# Altium PCB processingModule.PcbDoc
Units mil, origin at the board's own origin, x right, y up, seen from the top; angles counter-clockwise.
Board outline 4785 x 2440 mil, 2 copper layers (Top Layer, Bottom Layer); 76 components, 68 nets, 344 pads, 1 vias.
Unrouted connection lines stored in the file: 160.
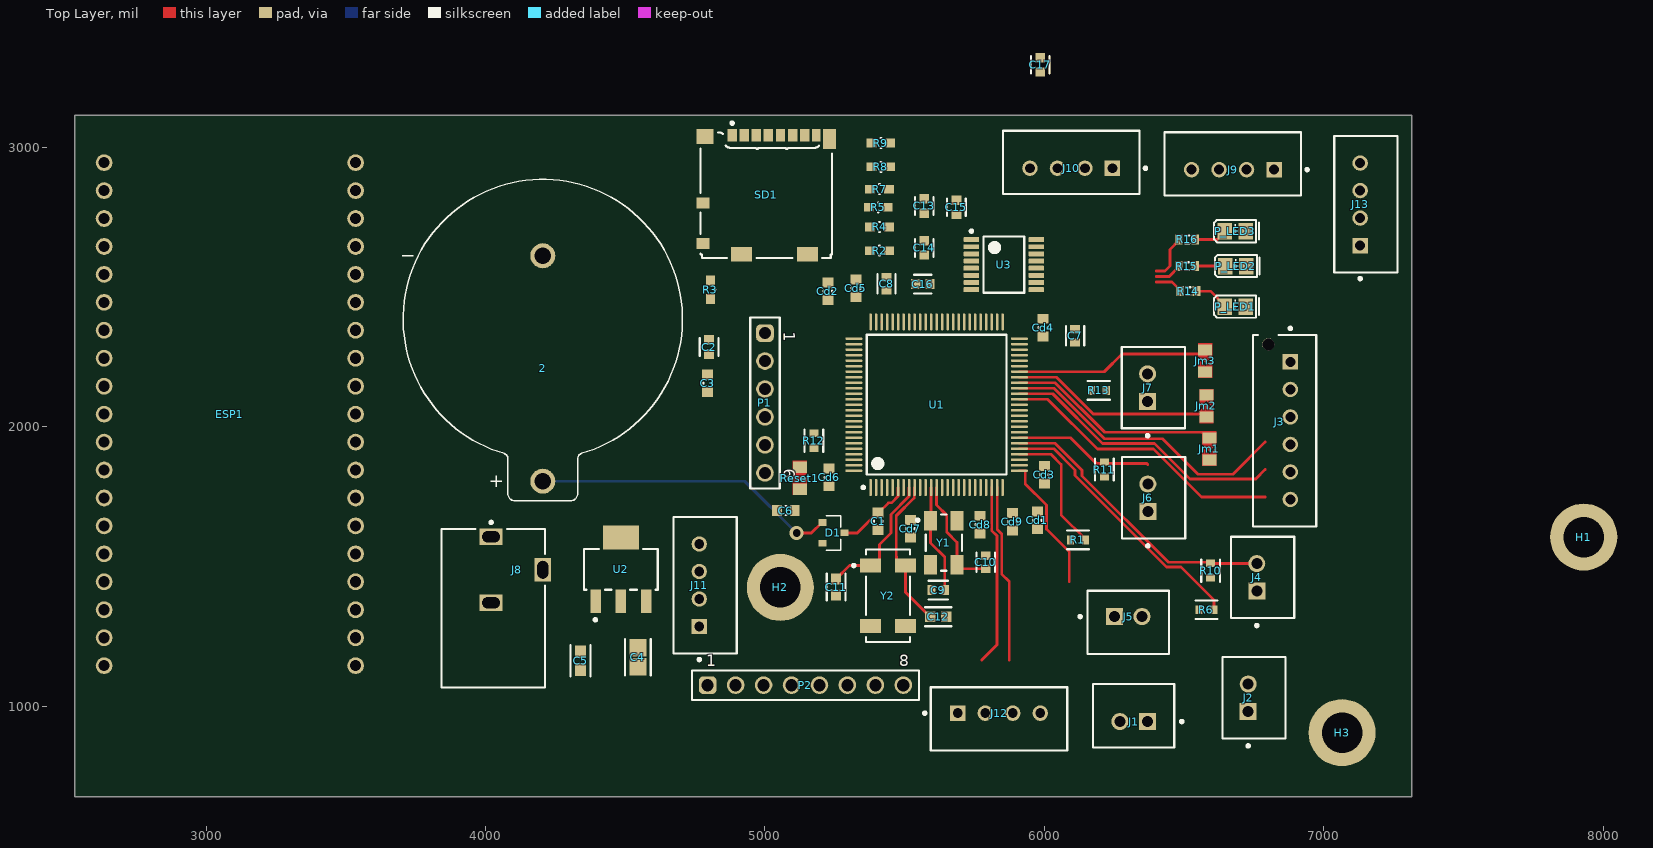
[diagram p0: Top Layer view]
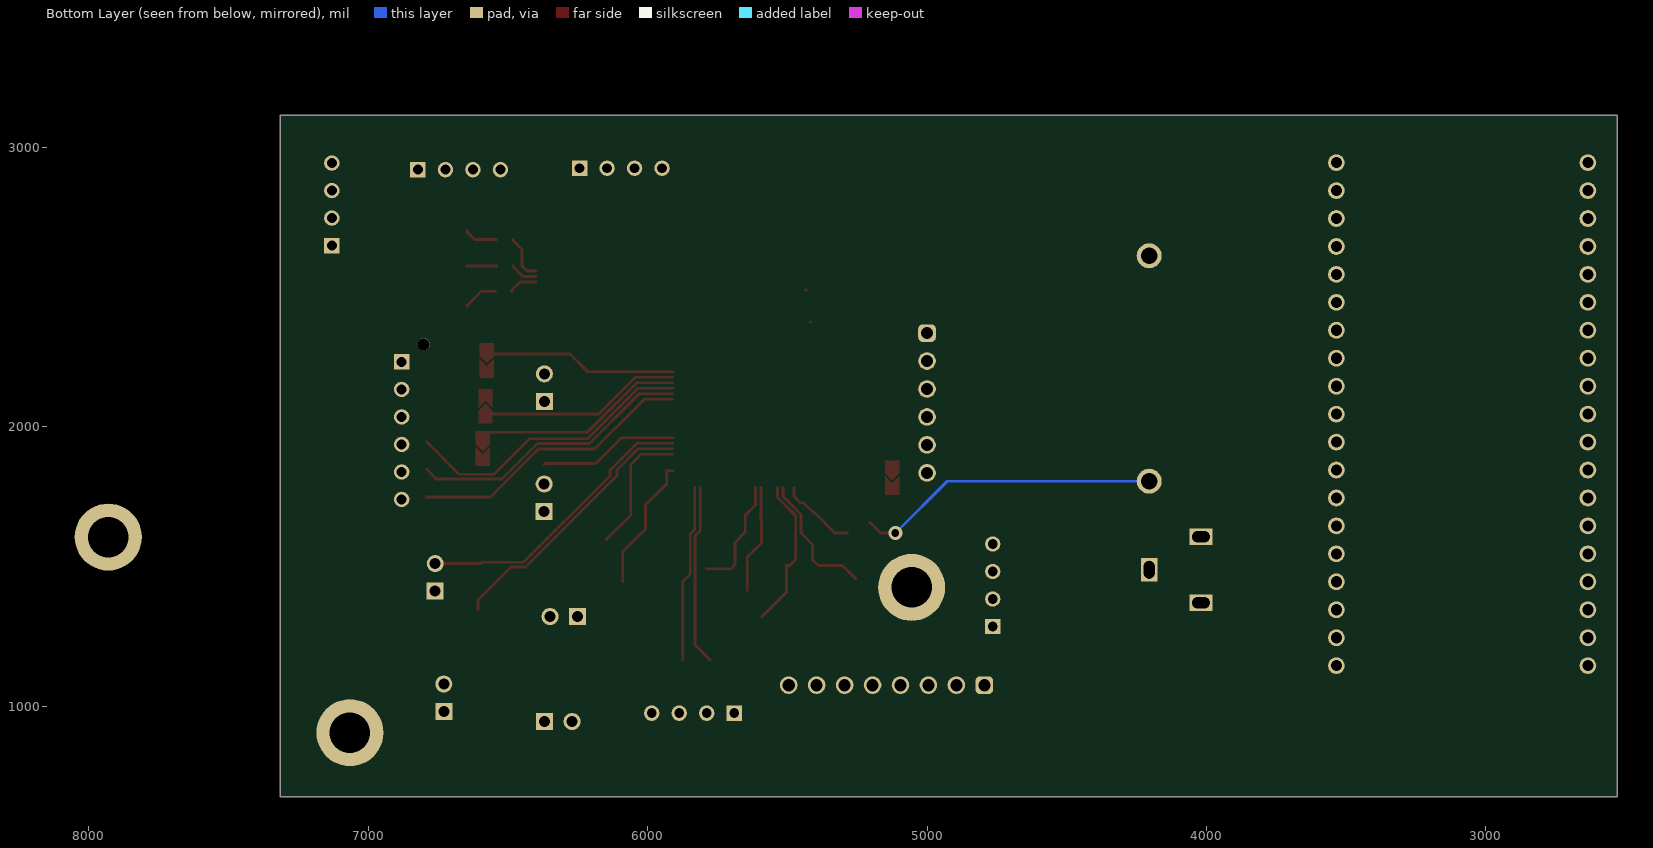
[diagram p1: Bottom Layer view, seen from below]

## Layer stack, top to bottom
Top Solder: solder mask 0.4, Solder Resist, Dk 3.5
Top Layer: signal copper 1.4
Dielectric 1: dielectric 12.6, FR-4, Dk 4.8
Bottom Layer: signal copper 1.4
Bottom Solder: solder mask 0.4, Solder Resist, Dk 3.5

## Board outline
2530,675 7315,675 7315,3115 2530,3115

## Design rules (kind name [scope] priority, off if disabled: settings)
Clearance [All] p1: gap=10 ignorepadtopadclearanceinfootprint=TRUE except(0: Arc-Hole Track-Hole SMDPad-Hole THPad-Hole Via-Hole Fill-Hole Poly-Hole Region-Hole Text-Hole; 7: Arc-Arc Arc-Track Track-Track SMDPad-SMDPad; 8: Arc-SMDPad Track-SMDPad)
PolygonConnect [All] p1: connectstyle=Relief reliefconductorwidth=10 reliefentries=4 polygonreliefangle="90 Angle" airgapwidth=10
RoutingVias [All] p1: holewidth=28 width=50 viastyle="Through Hole" minholewidth=28 minwidth=50 maxholewidth=28 maxwidth=50
SolderMaskExpansion [All] p1: expansion=4 istentingtop=FALSE
Width [All] p1: maxlimit=100 minlimit=7 preferedwidth=10 minimp=50.000000 maximp=50.000000 favimp=50.000000
30 further rules are at their usual default settings.

## Components (designator, comment, footprint, x,y, rotation, side; value= is the part's Value field where it differs from the comment)
2 "104" BAT_104 4205,2385 r0 top (schematic designator BT1)
C1 "CAP 10uF 10V 0603(1608)" CAPC0603(1608)100_N 5405,1661.5 r90 top value=10uF
C2 "C0603X104K5RACTU" FP-C0603-CJ-MFG 4800,2285 r90 top value=100nF
C3 "CAP 10uF 10V 0603(1608)" CAPC0603(1608)100_N 4795,2155 r90 top value=10uF
C4 "C2012X5R1A336M125AC" FP-C2012-125-0_2-IPC_A 4545,1175 r270 top
C5 "GRM188R71C474KA88D" FP-GRM188-0_1-e0_2_0_5-IPC_A 4340,1162.45 r270 top
C6 "CAP 100nF 16V 0603(1608)" CAPC0603(1608)100_N 5075,1700 r0 top value=100nF
C7 "C0603C225K4PACTU" FP-C0603C225K4PACTU-MFG 6110,2325 r90 top
C8 "C0603C225K4PACTU" FP-C0603C225K4PACTU-MFG 5435,2511.38 r90 top
C9 "C0603C200J5GACTU" FP-C0603C-CF-MFG 5620,1415 r180 top value="20 pF"
C10 "C0603C200J5GACTU" FP-C0603C-CF-MFG 5790,1515 r90 top value="20 pF"
C11 "CL10C500JC81PNC" FP-CL10-IPC_B 5255,1426.38 r270 top
C12 "CL10C500JC81PNC" FP-CL10-IPC_B 5620,1320 r0 top
C13 "C0603X104K5RACTU" FP-C0603-CJ-MFG 5570,2790 r270 top value=100nF
C14 "C0603X104K5RACTU" FP-C0603-CJ-MFG 5570,2640 r270 top value=100nF
C15 "C0603X104K5RACTU" FP-C0603-CJ-MFG 5685,2785 r90 top value=100nF
C16 "C0603X104K5RACTU" FP-C0603-CJ-MFG 5565,2510 r180 top value=100nF
C17 "C0603X104K5RACTU" FP-C0603-CJ-MFG 5985,3295 r270 top value=100nF
Cd1 "CAP 10uF 10V 0603(1608)" CAPC0603(1608)100_N 5975,1665 r270 top value=10uF
Cd2 "CAP 10uF 10V 0603(1608)" CAPC0603(1608)100_N 5225,2485 r270 top value=10uF
Cd3 "CAP 100nF 16V 0603(1608)" CAPC0603(1608)100_N 6000,1828.5 r90 top value=100nF
Cd4 "CAP 100nF 16V 0603(1608)" CAPC0603(1608)100_N 5995,2355 r270 top value=100nF
Cd5 "CAP 100nF 16V 0603(1608)" CAPC0603(1608)100_N 5325,2495 r270 top value=100nF
Cd6 "CAP 100nF 16V 0603(1608)" CAPC0603(1608)100_N 5230,1818.5 r270 top value=100nF
Cd7 "CAP 100nF 16V 0603(1608)" CAPC0603(1608)100_N 5520,1635 r90 top value=100nF
Cd8 "CAP 100nF 16V 0603(1608)" CAPC0603(1608)100_N 5770,1650 r90 top value=100nF
Cd9 "CAP 100nF 16V 0603(1608)" CAPC0603(1608)100_N 5885,1660 r90 top value=100nF
D1 "BAT54C" SOT23-R 5245,1620 r270 top
ESP1 "eecs300esp32" eecs300esp32-Footprint-1 3085,2045 r0 top
H1 "Mount_Holes" MountHole-4-40PTH 7930,1605 r90 top
H2 "Mount_Holes" MountHole-4-40PTH 5055,1425 r90 top
H3 "Mount_Holes" MountHole-4-40PTH 7065,905 r90 top
J1 "B2B-XH-A(LF)(SN)" FP-B2B-XH-A_LF_SN-MFG 6319.21,965.67 r180 top
J2 "B2B-XH-A(LF)(SN)" FP-B2B-XH-A_LF_SN-MFG 6750,1030 r90 top
J3 "B6B-XH-AM(LF)(SN)" FP-B6B-XH-AM_LF_SN-MFG 6859.33,1985.79 r90 top
J4 "B2B-XH-A(LF)(SN)" FP-B2B-XH-A_LF_SN-MFG 6780.67,1460.79 r90 top
J5 "B2B-XH-A(LF)(SN)" FP-B2B-XH-A_LF_SN-MFG 6300,1300 r0 top
J6 "B2B-XH-A(LF)(SN)" FP-B2B-XH-A_LF_SN-MFG 6390.67,1745.79 r90 top
J7 "B2B-XH-A(LF)(SN)" FP-B2B-XH-A_LF_SN-MFG 6390,2140 r90 top
J8 "PJ-102B" CUI-PJ-102B_V 4020,1488.11 r270 top
J9 "B4B-XH-A(LF)(SN)" FP-B4B-XH-A_LF_SN-MFG 6674.21,2940.67 r0 top
J10 "B4B-XH-A(LF)(SN)" FP-B4B-XH-A_LF_SN-MFG 6095.79,2945.67 r0 top
J11 "B4B-XH-A(LF)(SN)" FP-B4B-XH-A_LF_SN-MFG 4785.67,1432.64 r270 top
J12 "B4B-XH-A(LF)(SN)" FP-B4B-XH-A_LF_SN-MFG 5837.64,954.33 r180 top
J13 "B4B-XH-A(LF)(SN)" FP-B4B-XH-A_LF_SN-MFG 7150.67,2795.79 r270 top
Jm1 "SolderJumper" bridge 6590,1925 r270 top
Jm2 "SolderJumper" bridge 6580,2070 r90 top
Jm3 "SolderJumper" bridge 6575,2240 r270 top
P1 "Programming" 61300611121 5000,2085 r270 top
P2 "61300811121" 61300811121 5145,1075 r0 top
P_LED1 "LED2" LED0805 6682.6,2430 r0 top
P_LED2 "LED2" LED0805 6685,2575 r0 top
P_LED3 "LED2" LED0805 6682.6,2700 r0 top
R1 "RC0603FR-0710KL" FP-RC0603-0_55-IPC_C 6120,1595 r0 top
R2 "RC0603FR-0747KL" FP-RC0603FR-0747KL-MFG 5410,2630 r180 top
R3 "RC0603FR-0747KL" FP-RC0603FR-0747KL-MFG 4805,2490 r90 top
R4 "RC0603FR-0747KL" FP-RC0603FR-0747KL-MFG 5410,2715 r180 top
R5 "RC0603FR-0747KL" FP-RC0603FR-0747KL-MFG 5405,2785 r180 top
R6 "RC0603FR-0710KL" FP-RC0603-0_55-IPC_C 6580,1345 r0 top
R7 "RC0603FR-0747KL" FP-RC0603FR-0747KL-MFG 5410,2850 r180 top
R8 "RC0603FR-0747KL" FP-RC0603FR-0747KL-MFG 5415,2930 r180 top
R9 "RC0603FR-0747KL" FP-RC0603FR-0747KL-MFG 5415,3015 r0 top
R10 "RC0603FR-0710KL" FP-RC0603-0_55-IPC_C 6595,1485 r90 top
R11 "RC0603FR-0710KL" FP-RC0603-0_55-IPC_C 6215,1846.64 r90 top
R12 "RC0603FR-0710KL" FP-RC0603-0_55-IPC_C 5175,1950 r270 top
R13 "RC0603FR-0710KL" FP-RC0603-0_55-IPC_C 6195,2130 r0 top
R14 "500" J1-0603 6515,2485 r0 top value=10K
R15 "500" J1-0603 6510,2575 r0 top value=10K
R16 "500" J1-0603 6510.47,2670 r0 top value=10K
Reset1 "SolderJumper" bridge 5125,1820 r270 top
SD1 "104031-0811" MOLX-104031-0811_V 5005,2830 r180 top
U1 "STM32F407VGT7TR" STM-LQFP100_L 5614.37,2078.74 r90 top
U2 "LM3940IMP-3.3/NOPB" FP-DCY0004A-MFG 4484.45,1489.17 r90 top
U3 "MAX3232IPWR" PW0016A_N 5855,2580 r0 top
Y1 "ABM3B-8.000MHZ-10-D-1-G-T" FP-ABM3B-MFG 5640,1585 r270 top
Y2 "ABS25-32.768KHZ-T" FP-ABS25-MFG 5440,1395 r270 top

## Footprints (in the part's own frame and the unit in brackets; to place one, negate y for a bottom-side part, rotate by r counter-clockwise, add the part's x,y. Pads: shape width x height; smd on the part's side, far side on the other; paste and mask are expansions set on the pad)
61300611121 [mm] "Pin Header, pitch 2.54 mm, THT, Vertical, single row, 6p"
  rrect50% 1.6x1.6 hole 1.1: 1(-6.35,0)
  round 1.6 hole 1.1: 2(-3.81,0) 3(-1.27,0) 4(1.27,0) 5(3.81,0) 6(6.35,0)
  silkscreen extent -7.77,-1.35 7.77,1.35, body extent -7.62,-1.27 7.62,1.27, height 8.57
61300811121 [mm] "Pin Header, pitch 2.54 mm, THT, Vertical, single row, 8p"
  rrect50% 1.6x1.6 hole 1.1: 1(-8.89,0)
  round 1.6 hole 1.1: 2(-6.35,0) 3(-3.81,0) 4(-1.27,0) 5(1.27,0) 6(3.81,0) 7(6.35,0) 8(8.89,0)
  silkscreen extent -10.31,-1.35 10.31,1.35, body extent -10.16,-1.27 10.16,1.27, height 8.57
BAT_104 [mm]
  round 2.28 hole 1.52: N(0,5.758) P(0,-14.732)
  silkscreen extent -12.77,-16.51 12.7,12.7
bridge [mil]
  rect 40x50 smd: 1(-35,0) 2(44,0)
  Top Layer region: -2,-25 23,0 -2,25 64,25 64,-25
  Top Layer region: -58,-25 -13,-25 12,0 -13,25 -58,25
CAPC0603(1608)100_N [mm] "Chip Capacitor, Body 1.6x0.8mm, Height 1.0mm, IPC Medium Density"
  rect 0.9x1 smd: 1(-0.8,0) 2(0.8,0)
  silkscreen extent -0.05,-0.4 0.05,0.4, body extent -0.87,-0.48 0.88,0.47, height 1
CUI-PJ-102B_V [mm] "THD, 3-Leads, Body 14.4x9mm, Height 11mm"
  rect 1.5x2.1 hole 1 slot 1.6 at 90 deg: 1(-3,0) 2(3,0)
  rect 2.1x1.5 hole 1 slot 1.6 at 0 deg: 3(0,4.7)
  silkscreen extent -4.42,-4.5 10.7,4.9, body extent -3.7,-4.5 10.7,4.9, height 11
eecs300esp32-Footprint-1 [mil]
  round 60 hole 40: 1(-450,900) 2(-450,800) 3(-450,700) 4(-450,600) 5(-450,500) 6(-450,400) 7(-450,300) 8(-450,200) 9(-450,100) 10(-450,0) 11(-450,-100) 12(-450,-200) 13(-450,-300) 14(-450,-400) 15(-450,-500) 16(-450,-600) 17(-450,-700) 18(-450,-800) 19(-450,-900) 20(450,-900) 21(450,-800) 22(450,-700) 23(450,-600) 24(450,-500) 25(450,-400) 26(450,-300) 27(450,-200) 28(450,-100) 29(450,0) 30(450,100) 31(450,200) 32(450,300) 33(450,400) 34(450,500) 35(450,600) 36(450,700) 37(450,800) 38(450,900) ""(-450,-600) ""(450,-600)
  body extent -505,-955 505,945, height 190
FP-ABM3B-MFG [mm]
  rect 1.8x1.2 smd paste+0 mask+0: 1(-2,-1.2) 2(2,-1.2) 3(2,1.2) 4(-2,1.2)
  silkscreen extent -2.55,-2.5 2.55,1.65, body extent -3,-1.9 3,1.9, height 0.25
FP-ABS25-MFG [mm]
  rect 1.3x1.9 smd paste+0 mask+0: 1(-2.75,-1.6) 2(2.75,-1.6) 3(2.75,1.6) 4(-2.75,1.6)
  silkscreen extent -4.2,-3.22 4.2,2, body extent -4.3,-2.65 4.3,2.65, height 0.25
FP-B2B-XH-A_LF_SN-MFG [mm]
  rect 1.55x1.55 hole 1 paste-1000 mask+0: 1(-1.25,0.525)
  round 1.55 hole 1 paste-1000 mask+0: 2(1.25,0.525)
  silkscreen extent -4.5,-2.88 3.7,2.88, body extent -3.8,-2.98 3.8,2.98, height 0.25
FP-B4B-XH-A_LF_SN-MFG [mm]
  rect 1.4x1.4 hole 0.9 paste-1000 mask+0: 1(3.75,-0.525)
  round 1.4 hole 0.9 paste-1000 mask+0: 2(1.25,-0.525) 3(-1.25,-0.525) 4(-3.75,-0.525)
  silkscreen extent -6.2,-2.88 6.88,2.88, body extent -6.3,-2.98 6.3,2.98, height 0.25
FP-B6B-XH-AM_LF_SN-MFG [mm]
  rect 1.4x1.4 hole 0.9 paste-1000 mask+0: 1(6.25,-0.525)
  round 1.4 hole 0.9 paste-1000 mask+0: 2(3.75,-0.525) 3(1.25,-0.525) 4(-1.25,-0.525) 5(-3.75,-0.525) 6(-6.25,-0.525)
  round 1.1 hole 1.1 unplated paste-1000 mask+0: ""(7.85,1.475)
  silkscreen extent -8.7,-2.88 9.42,2.88, body extent -8.8,-2.98 8.8,2.98, height 0.25
FP-C0603-CJ-MFG [mm]
  rect 0.85x0.9 smd paste+0 mask+0: 1(-0.65,0) 2(0.65,0)
  silkscreen extent -0.8,-0.85 0.8,0.85, body extent -1.2,-0.6 1.2,0.6, height 0.25
FP-C0603C225K4PACTU-MFG [mm]
  rect 0.75x0.9 smd paste+0 mask+0: 1(-0.6,0) 2(0.6,0)
  silkscreen extent -0.87,-0.82 0.87,0.82, body extent -1.2,-0.6 1.2,0.6, height 0.25
FP-C0603C-CF-MFG [mm]
  rect 0.75x0.9 smd paste+0 mask+0: 1(-0.6,0) 2(0.6,0)
  silkscreen extent -0.87,-0.85 0.88,0.85, body extent -1.2,-0.6 1.2,0.6, height 0.25
FP-C2012-125-0_2-IPC_A [mil]
  rect 62.13x61.27 smd paste+0 mask+0: 1(-34.02,0) 2(34.02,0)
  silkscreen extent -65,-46 65,46, body extent -85,-50 85,50, height 10
FP-CL10-IPC_B [mil]
  rect 37.72x35.91 smd paste+0 mask+0: 1(-28.62,0) 2(28.62,0)
  silkscreen extent -47,-34 47,34, body extent -57,-28 57,28, height 10
FP-DCY0004A-MFG [mm]
  rect 2.15x0.95 smd paste+0 mask+0: 1(-2.9,2.3) 2(-2.9,0) 3(-2.9,-2.3)
  rect 2.15x3.25 smd paste+0 mask+0: 4(2.9,0)
  silkscreen extent -4.7,-3.35 1.85,3.35, body extent -4.08,-3.45 4.08,3.45, height 0.25
FP-GRM188-0_1-e0_2_0_5-IPC_A [mil]
  rect 45.62x39.85 smd paste+0 mask+0: 1(-32.55,0) 2(32.55,0)
  silkscreen extent -55,-36 55,36, body extent -75,-40 75,40, height 10
FP-RC0603-0_55-IPC_C [mil]
  rect 25.93x31.97 smd paste+0 mask+0: 1(-26.64,0) 2(26.64,0)
  silkscreen extent -40,-33 40,33, body extent -44,-22 44,22, height 10
FP-RC0603FR-0747KL-MFG [mm]
  rect 0.9x0.8 smd paste+0 mask+0: 1(-0.85,0) 2(0.85,0)
  silkscreen extent -0.03,-0.45 0.03,0.45, body extent -1.4,-0.55 1.4,0.55, height 0.25
J1-0603 [mm]
  rect 0.7x0.9 smd: 1(-0.75,0) 2(0.75,0)
  silkscreen extent -0.2,-0.35 0.2,0.35, body extent -0.85,-0.48 0.85,0.48, height 0.9
LED0805 [mm]
  rect 1.3x1.5 smd: 1(-0.95,0) 2(0.95,0)
  silkscreen extent -1.91,-1.02 2.16,1.02, body extent -1.03,-0.45 1.03,0.46, height 0.85
MOLX-104031-0811_V [mm] "Micro SD, 8-Leads, Body 11.95x11.4mm, Pitch 1.1mm"
  rect 0.85x1.1 smd: 1(3.113,-5.412) 2(2.013,-5.412) 3(0.913,-5.412) 4(-0.188,-5.412) 5(-1.288,-5.412) 6(-2.387,-5.412) 7(-3.487,-5.412)
  rect 0.75x1.1 smd: 8(-4.537,-5.412)
  rect 1.2x1 smd: 9(5.748,0.738) 10(5.748,4.438)
  rect 1.55x1.35 smd: 11(5.573,-5.287)
  rect 1.17x1.8 smd: 12(-5.747,-5.062)
  rect 1.9x1.35 smd: 13(-3.722,5.413) 14(2.248,5.413)
  silkscreen extent -5.97,-6.64 5.98,5.74, body extent -5.97,-5.66 5.98,5.74, height 1.45
MountHole-4-40PTH [mil] "#4-40 machine screw PTH mount"
  round 240 hole 145: 0(0,0)
PW0016A_N [mm] "SOP, 16-Leads, Body 5.1x4.5mm, Pitch 0.65mm, IPC Medium Density"
  rrect22% 1.4x0.45 smd: 1(-2.95,2.275) 2(-2.95,1.625) 3(-2.95,0.975) 4(-2.95,0.325) 5(-2.95,-0.325) 6(-2.95,-0.975) 7(-2.95,-1.625) 8(-2.95,-2.275) 9(2.95,-2.275) 10(2.95,-1.625) 11(2.95,-0.975) 12(2.95,-0.325) 13(2.95,0.325) 14(2.95,0.975) 15(2.95,1.625) 16(2.95,2.275)
  silkscreen extent -3.07,-2.55 1.85,3.17, body extent -3.21,-2.5 3.21,2.5, height 1
SOT23-R [mm]
  rect 0.6x0.7 smd: 1(-0.95,-1) 2(0.95,-1) 3(0,1)
  silkscreen extent -1.57,-0.65 1.57,0.66, body extent -1.05,-1 1.05,1, height 1.1
STM-LQFP100_L [mm] "Thin QFP, 100-Leads, Body 14x14mm, Pitch 0.5mm, IPC High Density"
  oval 1.55x0.25 smd: 1(-7.525,6) 2(-7.525,5.5) 3(-7.525,5) 4(-7.525,4.5) 5(-7.525,4) 6(-7.525,3.5) 7(-7.525,3) 8(-7.525,2.5) 9(-7.525,2) 10(-7.525,1.5) 11(-7.525,1) 12(-7.525,0.5) 13(-7.525,0) 14(-7.525,-0.5) 15(-7.525,-1) 16(-7.525,-1.5) 17(-7.525,-2) 18(-7.525,-2.5) 19(-7.525,-3) 20(-7.525,-3.5) 21(-7.525,-4) 22(-7.525,-4.5) 23(-7.525,-5) 24(-7.525,-5.5) 25(-7.525,-6) 51(7.525,-6) 52(7.525,-5.5) 53(7.525,-5) 54(7.525,-4.5) 55(7.525,-4) 56(7.525,-3.5) 57(7.525,-3) 58(7.525,-2.5) 59(7.525,-2) 60(7.525,-1.5) 61(7.525,-1) 62(7.525,-0.5) 63(7.525,0) 64(7.525,0.5) 65(7.525,1) 66(7.525,1.5) 67(7.525,2) 68(7.525,2.5) 69(7.525,3) 70(7.525,3.5) 71(7.525,4) 72(7.525,4.5) 73(7.525,5) 74(7.525,5.5) 75(7.525,6)
  oval 0.25x1.55 smd: 26(-6,-7.525) 27(-5.5,-7.525) 28(-5,-7.525) 29(-4.5,-7.525) 30(-4,-7.525) 31(-3.5,-7.525) 32(-3,-7.525) 33(-2.5,-7.525) 34(-2,-7.525) 35(-1.5,-7.525) 36(-1,-7.525) 37(-0.5,-7.525) 38(0,-7.525) 39(0.5,-7.525) 40(1,-7.525) 41(1.5,-7.525) 42(2,-7.525) 43(2.5,-7.525) 44(3,-7.525) 45(3.5,-7.525) 46(4,-7.525) 47(4.5,-7.525) 48(5,-7.525) 49(5.5,-7.525) 50(6,-7.525) 76(6,7.525) 77(5.5,7.525) 78(5,7.525) 79(4.5,7.525) 80(4,7.525) 81(3.5,7.525) 82(3,7.525) 83(2.5,7.525) 84(2,7.525) 85(1.5,7.525) 86(1,7.525) 87(0.5,7.525) 88(0,7.525) 89(-0.5,7.525) 90(-1,7.525) 91(-1.5,7.525) 92(-2,7.525) 93(-2.5,7.525) 94(-3,7.525) 95(-3.5,7.525) 96(-4,7.525) 97(-4.5,7.525) 98(-5,7.525) 99(-5.5,7.525) 100(-6,7.525)
  silkscreen extent -7.65,-6.35 6.35,6.8, body extent -7,-7 7,7, height 1.6

## Part data
2: Package=None, Availability=Unavailable, MP=104, Price=None
C1 C3 Cd1 Cd2: library part CMP-1035-02799-1, "CAP 10uF 10V ±10% 0603 (1608 Metric) Thickness 1mm SMD", Case-EIA=0603, Case-Metric=1608, Rated Voltage="10 V", Tolerance=±10%, Max Thickness="1 mm", Technology=SMT
C2 C13 C14 C15 C16 C17: library part CMP-2006-03300-2, "CAP CER 0.1UF 50V X7R 0603", Capacitance=100nF, Manufacturer=Kemet, Package=C0603-CJ, Temperature="-55°C to +125°C", Temperature Characteristic=X7R, Temperature Coefficient=15%, Temperature Range High=+125°C, Temperature Range Low=-55°C, Tolerance=10%, Voltage=50V, Automotive=No, Category=Cap, ComponentLink2Description=Datasheet, ComponentLink2URL=https://content.kemet.com/datasheets/KEM_C1013_X7R_FT-CAP_SMD.pdf, Device Class L1="Passive Components", Device Class L2=Capacitors, Device Class L3="Ceramic Capacitors", Digikey Description="CAP CER 0.1UF 50V X7R 0603", Height=0.95mm, Ipc Land Pattern Name=CAPC16080X80, Lead Free=Yes, Manufacturer Part Number=C0603X104K5RACTU, Material=Ceramic, Mouser Description="Capacitor; Ceramic; Cap 0.1uF; Tol+10%; SMT; Flexible Termination; Vol-Rtg 50V; TR", Octopart=https://octopart.com/c0603x104k5ractu-kemet-9145062, RoHS=TRUE, Voltage Rating=50V
C4: library part CMP-08246-002720-1, "Multilayer Ceramic Capacitors 33μF ±20% 10V X5R SMD 0805", Capacitance=33uF, Case Code (Imperial)=0805, Case Code (Metric)=2012, Dielectric=X5R, Dielectric Material=Ceramic, Max Operating Temperature=85°C, Min Operating Temperature=-55°C, Package Quantity=1, Tolerance=20%, Voltage Rating=10V, Case/Package=0805, Depth=1.25mm, Height=1.25mm, Lead Free="Lead Free", Length=2mm, Mount="Surface Mount", Packaging="Tape and Reel", REACH SVHC="No SVHC", Resistor Type=Ceramic, RoHS Compliant=Yes, Series=C, Termination=SMD/SMT, Thickness=0.057inch, Voltage Rating (DC)=10V, Weight=0.000194oz, Width=0.049inch
C5: library part CMP-2006-02860-2, "Chip Multilayer Ceramic Capacitors for General Purpose, 0603, 0.47uF, X7R, 15%, 10%, 16V", Capacitance=470nF, Case Code (Imperial)=0603, Case Code (Metric)=1608, Dielectric=X7R, Max Operating Temperature=125°C, Min Operating Temperature=-55°C, Package Quantity=1, Tolerance=10%, Voltage=16V, Case/Package=0603, Depth=0.8mm, Height=0.8mm, Lead Free="Lead Free", Length=1.6mm, Material=Ceramic, Mount="Surface Mount", Number of Pins=2, Packaging="Tape and Reel", REACH SVHC="No SVHC", Termination=SMD/SMT, Thickness=0.035inch, Voltage Rating=16V, Voltage Rating (DC)=16V, Width=0.8mm
C6 Cd3 Cd4 Cd5 Cd6 Cd7 Cd8 Cd9: library part CMP-1035-02583-1, "CAP 100nF 16V ±5% 0603 (1608 Metric) Thickness 1mm SMD", Case-EIA=0603, Case-Metric=1608, Rated Voltage="16 V", Tolerance=±5%, Max Thickness="1 mm", Technology=SMT
C7 C8: library part CMP-2006-02259-2, "CAP CER 2.2UF 16V X5R 0603", Capacitance=2.2uF, Case Code (Imperial)=0603, Case Code (Metric)=1608, Dielectric=X5R, Dielectric Material=Ceramic, Max Operating Temperature=85°C, Min Operating Temperature=-55°C, Package Quantity=1, Tolerance=10%, Voltage=16V, Case/Package=0603, Construction=Flat, Contact Plating=Tin, Depth=0.8mm, Dissipation Factor=5%, Height=0.8mm, Lead Free="Lead Free", Length=1.6mm, Mount="Surface Mount", Number of Pins=2, Packaging="Tape and Reel", Radiation Hardening=No, REACH SVHC="No SVHC", RoHS Compliant=Yes, Series=C, Termination=SMD/SMT, Thickness=0.034inch, Voltage Rating=16V, Voltage Rating (DC)=16V, Width=0.8mm
C9 C10: library part CMP-1035-00783-3, "CAP CER 20PF 50V 5% NP0 0603", Capacitance="20 pF", Manufacturer=KEMET, Package=C0603C-CF, Temperature="-55°C to +125°C", Temperature Characteristic=C0G, Temperature Coefficient=30ppm/°C, Temperature Range High=+125°C, Temperature Range Low=-55°C, Tolerance=0.05, Voltage Rating="50 V", Automotive=Yes, Automotive Grade="Grade 1", Category=Cap, ComponentLink2Description=Datasheet, ComponentLink2URL=https://api.kemet.com/component-edge/download/datasheet/C0603C100J5GACAUTO.pdf, Device Class L1="Passive Components", Device Class L2=Capacitors, Device Class L3="Ceramic Capacitors", Digikey Description="CAP CER 20PF 50V 5% NP0 0603", Height=0.87mm, Lead Free=Yes, Manufacturer Part Number=C0603C200J5GACTU, Material=Ceramic, Mouser Description="Multilayer Ceramic Capacitors MLCC - SMD/SMT 50volts 20pF C0G 5%", Octopart=https://octopart.com/c0603c200j5gactu-kemet-9138585, RoHS=TRUE
C11 C12: library part CMP-13271-000864-1, "Cap Ceramic 50pF 100V C0G ±5% Pad SMD 0603 +125°C T/R", Capacitance=50pF, Case Code (Imperial)=0603, Case Code (Metric)=1608, Max Operating Temperature=125°C, Min Operating Temperature=-55°C, Ratings=AEC-Q200, Tolerance=5%, Voltage Rating=100V, Case/Package=0603, Length=0.063inch, Mount="Surface Mount", Packaging="Tape and Reel", Thickness=0.035inch, Width=0.031inch
D1: "DIODE, SCHOTTKY, DUAL; Diode Type:Schottky; Voltage, Vrrm:30V; Current, If AV:300mA; Current, Ifsm:1A; Voltage, Vf Max:0.4V; Max Junction Temperature, Tj:150Â°C; Termination Type:SMD; Case Style:SOT-23; No. of Pins:3; Current, If ;RoHS Compliant: Yes", Package="SOT-23-3 ON Semiconductor", Availability="In Stock", Check_prices=https://www.snapeda.com/parts/BAT54C/Onsemi/view-part/?ref=eda, MF="ON Semiconductor", MP=BAT54C, Price=None, Purchase-URL=https://pricing.snapeda.com/search/part/BAT54C/?ref=eda, SnapEDA_Link=https://www.snapeda.com/parts/BAT54C/Onsemi/view-part/?ref=snap
ESP1: library part CMP-001-0002-2, "HiLetgo ESP32 knock off"
J1 J2 J4 J5 J6 J7: library part CMP-2000-05888-3, "CONN HEADER VERT 2POS 2.5MM", Color=Natural, Contact Resistance=20mR, Current Rating=3A, Housing Color=White, Insulation Resistance=1GR, Max Operating Temperature=85°C, Max Voltage Rating (AC)=250V, Min Operating Temperature=-25°C, Connector Type="Male Pin", Contact Material=Brass, Contact Plating=Tin, Contact Type="Male Pin", Depth=5.75mm, Fastening Type=Detent, Housing Material=Polyamide, Lead Free="Lead Free", Lead Pitch=2.5mm, Length=7.4mm, Max Current Rating=3A, Max Voltage Rating (DC)=250V, Mount="Through Hole", Number of Contacts=2, Number of Positions=2, Number of Rows=1, Orientation=Straight, Packaging=Bulk, Pitch=2.5mm, REACH SVHC="No SVHC", Series=XH, Termination=Solder, Voltage Rating=250V, Voltage Rating (AC)=250V, Wire/Cable Gauge=22AWG
J3: library part CMP-17439-000167-1, "CONN HEADER VERT 6POS 2.5MM", Current Rating=3A, Flammability Rating="UL94 V-0", Insulation Color=Natural, Max Operating Temperature=85°C, Min Operating Temperature=-25°C, Voltage Rating=250V, Connector Type=Header, Contact Finish - Mating=TIN, Contact Material=Brass, Contact Plating=Copper, Contact Shape=Square, Contact Type="Male Pin", Fastening Type=Detent, Height=7mm, Insulation Material=Nylon, Length=17.4mm, Mated Stacking Heights=9.8mm, Mount="Through Hole", Number of Pins=6, Number of Poles=6, Number of Positions=6, Number of Rows=1, Packaging=Bulk, Pitch=2.5mm, Series=XH, Shape=Straight, Termination=Press-Fit, Width=5.75mm
J8: library part CMP-2000-06900-1, "Through Hole Right Angle DC Power Jack, 2.5 A, 2.5 mm Center Pin, 3 Position, -25 to 85 degC, RoHS, Bulk", Current Rating=2.5A, Flammability Rating=UL94V-0, Insulation Resistance=100MOhms, Manufacturer=CUIInc., Operating Temperature Range=-25Cto+85C, Package Description="3-Pin Through Hole Device, Body 14.4 x 9 mm, Height 11 mm", Voltage Rating=24V, Brand=CUI, Connector Type=DCPowerJack, Contact Gender=Male, Contact Material=Copper, Contact Plating=Nickel, Datasheet URL=http://www.cui.com/product/resource/pj-102b.pdf, Datasheet Version="Rev. 1.03, 04/2016", Factory Pack Quantity=280, Housing Material=PolybutyleneTerephthalate(PBT), Inside Contact Diameter=2.5mm, Manufacturer URL=http://www.cui.com/, Mounting Angle=Right, Mounting Style=ThroughHole, Mounting Technology=ThroughHole, Outside Contact Diameter=6.5mm, Package Reference=PJ-102B, Packaging=Bulk, Product=Jacks, Product Category=DCPowerConnectors, RoHS=True, Termination Style=ThroughHole
J9 J10 J11 J12 J13: library part CMP-17439-000250-1, "CONN HEADER VERT 4POS 2.5MM", Color=Natural, Contact Resistance=20mR, Current Rating=3A, Flammability Rating="UL94 V-0", Housing Color=White, Insulation Resistance=1GR, Max Operating Temperature=85°C, Max Voltage Rating (AC)=250V, Min Operating Temperature=-25°C, Package Quantity=500, Connector Type=Header, Contact Finish - Mating=TIN, Contact Material=Brass, Contact Plating=Tin, Contact Shape=Square, Contact Type="Male Pin", Depth=5.75mm, Fastening Type=Detent, Gender=Male, Housing Material=Polyamide, Insulation Color=Natural, Insulation Material=Nylon, Lead Free="Lead Free", Lead Pitch=2.5mm, Length=12.4mm, Mated Stacking Heights=9.8mm, Material=Polyamide, Max Current Rating=3A, Max Voltage Rating (DC)=250V, Mount="Through Hole", Number of Contacts=4, Number of Positions=4, Number of Rows=1, Orientation=Straight, Packaging=Bulk, Pitch=2.5mm, REACH SVHC="No SVHC", Series=XH, Termination=Solder, Voltage Rating=250V, Voltage Rating (AC)=250V, Wire/Cable Gauge=22AWG
Jm1 Jm2 Jm3 Reset1: "Solder Configuration Jumper", LatestRevisionDate=17-Jul-2002, LatestRevisionNote="Re-released for DXP Platform.", PackageDescription="Radial Cap, Thru-Hole; 2 Leads; 0.2 in Pin Spacing", PackageReference=RAD-0.2, Published=24-Mar-1999, Publisher="Altium Limited"
P1: library part CMP-1502-01070-2, Color=Black, Contact Resistance=20mΩ, Current Rating=3A, Max Operating Temperature=105°C, Min Operating Temperature=-40°C, Operating Supply Voltage=250V, Connector Type="Male Pin", Contact Gender=Male, Contact Material=Copper, Contact Mating Length=5.9944mm, Contact Plating=Gold, Gender=Male, Height=8.89mm, Housing Material=PBT, Lead Free="Lead Free", Lead Pitch=2.54mm, Mount="Through Hole", NexarPartId=20084590, Number of Contacts=6, Number of Pins=6, Number of Positions=6, Number of Rows=1, Orientation=Vertical, Packaging=Bulk, Pitch=2.54mm, REACH SVHC=Unknown, RoHS=Compliant, Termination="Through Hole", Voltage Rating=250V
P2: library part CMP-1502-01076-2, Color=Black, Contact Resistance=20mΩ, Current Rating=3A, Max Operating Temperature=105°C, Min Operating Temperature=-40°C, Operating Supply Voltage=250V, Connector Type="Male Pin", Contact Material=Copper, Contact Mating Length=5.9944mm, Contact Plating=Gold, Gender=Male, Height=8.54mm, Lead Pitch=2.54mm, Mount="Through Hole", NexarPartId=32855533, Number of Contacts=8, Number of Pins=8, Number of Positions=8, Number of Rows=1, Orientation=Vertical, Packaging=Bulk, Pitch=2.54mm, REACH SVHC=Unknown, RoHS=Compliant, Termination=Solder, Voltage Rating=250V
P_LED1 P_LED2 P_LED3: library part CMP-006-0052-1, "Typical RED, GREEN, YELLOW, AMBER GaAs LED", Component Type=Standard, Design Item ID=LED2, LatestRevisionDate=17-Jul-2002, LatestRevisionNote="Re-released for DXP Platform.", PackageDescription="SM LED; 2 Flat Leads", PackageReference=3.2X1.6X1.1, PackageVersion=Feb-2002, Pin Count=2, Published=8-Jun-2000, Publisher="Altium Limited", Source=SolarCar.SchLib
R1 R6 R10 R11 R12 R13: library part CMP-2100-03664-2, "RES 10K OHM 1% 1/10W 0603", Case Code (Imperial)=0603, Case Code (Metric)=1608, Max Operating Temperature=155°C, Max Power Dissipation=100mW, Min Operating Temperature=-55°C, Resistance=10kR, Resistance Tolerance=1%, Resistor Type="Thick Film", Temperature Coefficient=100ppm/°C, Voltage Rating=75V, Voltage Rating (DC)=50V, Case/Package=0603, Construction=Rectangular, Depth=0.8mm, Features="Moisture Resistant", Height=0.45mm, Lead Free="Lead Free", Lead Pitch=0.3mm, Length=1.6mm, Military Standard=Not, Number of Pins=2, Number of Terminations=2, Packaging="Tape and Reel", Power Rating=100mW, RoHS Compliant=Yes, Series=RC, Size Code=0603, Termination=SMD/SMT, Tolerance=1%, Weight=7.1E-05oz, Width=0.8mm
R2 R3 R4 R5 R7 R8 R9: library part CMP-1659-00055-2, "RES SMD 47K OHM 1% 1/10W 0603", Case Code (Imperial)=0603, Case Code (Metric)=1608, Max Operating Temperature=155°C, Max Power Dissipation=100mW, Min Operating Temperature=-55°C, Package Quantity=1, Resistance=47kR, Resistance Tolerance=1%, Resistor Type="Thick Film", Temperature Coefficient=100ppm/°C, Voltage Rating=50V, Case/Package=0603, Construction=Rectangular, Depth=0.8mm, Features="Moisture Resistant", Height=0.022inch, Lead Free="Lead Free", Length=0.063inch, Military Standard=Not, Number of Pins=2, Number of Terminations=2, Packaging="Tape and Reel", Power Rating=100mW, RoHS Compliant=Yes, Series=RC, Size Code=0603, Technology="THICK FILM", Termination=SMD/SMT, Tolerance=1%, Voltage Rating (DC)=50V, Width=0.031inch
R14 R15 R16: library part Res3, "Resistor", LatestRevisionDate=29-May-2009, LatestRevisionNote="IPC-7351 Footprint Added.", PackageDescription="Chip Resistor", PackageReference=J1-0603, Published=8-Jun-2000, Publisher="Altium Limited"
SD1: library part CMP-2000-05825-1, "Micro SD Card, RA, -25 to 85 degC, 8-Pin SMD, RoHS, Tape and Reel", Current Rating=500mA, Manufacturer=Molex, Package Description="8-Pin Surface Mount Device, Body 11.95 x 11.4 mm, Pitch 1.1 mm", Voltage Rating=10VAC/DC, Brand=Molex, Card Type=microSD, Contact Material=PhosphorBronze, Contact Plating=Gold, Datasheet URL=http://www.molex.com/pdm_docs/sd/1040310811_sd.pdf, Datasheet Version="Rev. E, 04/2006", Height=1.42mm, Housing Material=LiquidCrystalPolymer(LCP), Insertion - Extraction Style=Push-Pull, Length=11.4mm, Manufacturer URL=http://www.molex.com/, Mating Cycles=10000, Mounting Technology=SurfaceMount, Mounting Type=Standard, Number of Contacts=8, Number of Rows=1Row, Orientation=RightAngle, Package Reference=104031-0811, Packaging=Reel, Pitch=1.1mm, Product=CardConnectors, Product Category=MemoryCardConnectors, RoHS=True, Series=104031, Termination Style=SMD
U1: library part CMP-0243-00163-1, "ARM Cortex-M4 32-bit MCU+FPU, 1024 KB Flash, 192 KB Internal RAM, 82 I/Os, 100-Pin LQFP, -40 to 105 degC, Tape and Reel", I/Os (High Current)=82, Operating Frequency(F) (Processor speed) (MHz)=168, Package Description=LQFP100, Package Reference="100-Pin Low Profile Quad Flat Package, Body 14 x 14 mm, Pitch 0.5 mm", Supply Voltage(Vcc) min (V)=1.8, ComponentLink1Description="Manufacturer URL", ComponentLink1URL=http://www.st.com/, ComponentLink2Description=Datasheet, ComponentLink2URL=http://www.st.com/st-web-ui/static/active/en/resource/technical/document/datasheet/DM00037051.pdf, Core="ARM Cortex-M4", D/A Converter=2, DatasheetVersion="Rev. 6", FLASH Size (Prog) (kB)=1024, Internal RAM Size (kB)=192, Mounting Technology="Surface Mount", Packing="Tape and Reel"
U2: library part CMP-0062-01788-4, "IC REG LINEAR 3.3V 1A SOT223-4", Case/Package=SOT-223, Current Rating=1A, Dropout Voltage=500mV, Max Input Voltage=7.5V, Max Operating Temperature=125°C, Max Output Voltage=3.3V, Min Input Voltage=4.5V, Min Operating Temperature=-40°C, Package Quantity=1000, Quiescent Current=15mA, Contact Plating=Tin, Height=1.6mm, Lead Free="Lead Free", Length=6.5mm, Max Output Current=1A, Max Supply Voltage=7.5V, Min Supply Voltage=4.5V, Mount="Surface Mount", Nominal Output Voltage=3.3V, Number of Outputs=1, Number of Pins=4, Number of Regulators=1, Output Configuration=Positive, Output Current=1A, Output Type=Fixed, Output Voltage=3.3V, Packaging="Tape and Reel", Polarity=Positive, Radiation Hardening=No, REACH SVHC="No SVHC", Series=-, Termination=SMD/SMT, Width=3.56mm
U3: library part CMP-0299-01749-2, "3-V to 5.5-V Multichannel RS-232 Line Driver / Receiver with ±15-kV ESD Protection, -40 to 85 degC, 16-Pin TSSOP (PW), Green (RoHS & no Sb/Br)", Drivers Per Package=2, Supply Voltage(s)(V)="3.3 or 5.0", ComponentLink1Description="Manufacturer URL", ComponentLink1URL=www.ti.com, ComponentLink2Description=Datasheet, ComponentLink2URL=http://www.ti.com/general/docs/lit/getliterature.tsp?genericPartNumber=MAX3232&fileType=pdf, ComponentLink3Description="Package Specification", ComponentLink3URL=http://www.ti.com/litv/pdf/mpds361, DatasheetVersion=SLLS410I, ESD HBM(kV)=+/-15, ICC(Max)(mA)=1, PackageDescription="16-Pin Plastic Thin Small Outline Package 5 x 4.4 mm Body ,0.65 mm Pitch", PackageReference=PW0016A, PackageVersion="revG, Feb-2011", Receivers Per Package=2, RS-232=TRUE, Single Supply=TRUE, SubFamily=RS-232
Y1: library part CMP-27762-007005-1, "Crystal 8MHz ±10ppm 10pF SMD-4 5mm x 3.2mm", Case/Package=SMD/SMT, ESR (Equivalent Series Resistance)=200R, Frequency=8MHz, Frequency Stability=35ppm, Frequency Tolerance=10ppm, Load Capacitance=10pF, Max Operating Temperature=85°C, Min Operating Temperature=-40°C, Height=0.043inch, Lead Free="Lead Free", Length=0.197inch, Mount="Surface Mount", Packaging="Tape and Reel", RoHS Compliant=Yes, Width=0.126inch
Y2: library part CMP-2000-05037-2, "CRYSTAL 32.7680KHZ 12.5PF SMD", Case/Package=SMD/SMT, ESR (Equivalent Series Resistance)=50kR, Frequency=32.768kHz, Frequency Tolerance=20ppm, Load Capacitance=12.5pF, Max Operating Temperature=85°C, Min Operating Temperature=-40°C, Operating Frequency="32.768 kHz", Package Quantity=1000, Depth=3.8mm, Height=0.098inch, Lead Free="Lead Free", Length=8mm, Mount="Surface Mount", Number of Pins=4, Packaging="Tape and Reel", Radiation Hardening=No, REACH SVHC="No SVHC", RoHS Compliant=Yes, Series=ABS25, Series Resistance=50kR, Termination=SMD/SMT, Tolerance=20ppm, Width=3.8mm

## Via types
v1: diameter 50, hole 28, Top Layer to Bottom Layer, 1 vias

## Nets (pads, with @x,y where several pads share a name; then routed paths per layer and width w, separated by ;. In a path a pad name is that pad's centre, name@x,y a point inside that pad or via, vN(x,y) a via of type N, cw(c..) or ccw(c..) an arc to the next point about the centre after c; other vN are vias at no path point)
3v3: C2.1 C3.2 C4.1 C17.1 Cd1.2 Cd2.2 Cd3.2 Cd4.2 Cd5.2 Cd6.2 Cd7.2 Cd8.2 Cd9.2 D1.2 J9.4 J11.4 J13.3 P1.1 P2.2 R1.1 R2.1 R3.1 R4.1 R5.1 R6.1 R7.1 R8.1 R9.1 R10.1 R11.1 R13.1 Reset1.2 SD1.4 U1.11 U1.19 U1.21 U1.22 U1.28 U1.50 U1.75 U1.100 U2.3 U3.16
5V: C5.1 ESP1.19 J8.1 J12.4 J13.4 P2.1 U2.1
AC_PWR: J5.2 U1.26 | length 482.8
  Top Layer w10: U1.26 5931.14,1842.52 5931.22,1842.44 5931.22,1796.06 6007.69,1719.6 6007.69,1633.33 6089.21,1551.81 6089.21,1445.67
CAM_RX1: J12.2 U1.23 | length 647
  Top Layer w10: 5775.79,1165.67 5830,1219.88 5830,1610 5811.22,1628.78 U1.23
CAM_TX1: J12.3 U1.24 | length 634.7
  Top Layer w10: U1.24 5830.91,1633.14 5847,1617.04 5847,1473.02 5874.21,1445.81 5874.21,1165.67
ESP_RXs2: ESP1.34 U1.86
ESP_TXs2: ESP1.35 U1.87
GPIO_PE2: P2.3 U1.1
GPIO_PE3: P2.4 U1.2
GPIO_PE4: P2.5 U1.3
GPIO_PE5: P2.6 U1.4
GPIO_PE6: P2.7 U1.5
LED1: R14.1 U1.56 | length 101.4
  Top Layer w10: 6400,2517.83 6456.57,2517.83 6485.47,2488.94 R14.1
LED2: R15.1 U1.57 | length 98.3
  Top Layer w10: 6400,2537.52 6446.93,2537.52 6480.47,2571.06 R15.1
LED3: R16.1 U1.58 | length 164.6
  Top Layer w10: 6400,2557.2 6400.08,2557.28 6431.33,2557.28 6449.16,2575.12 6449.16,2634.28 6480.94,2666.06 R16.1
MPL3115_SCL2: J9.3 U1.47
MPL3115_SDA2: J9.2 U1.48
NetBT1_P: 2.P D1.1 | length 1093.4
  Top Layer w10: v1(5113.54,1619.25) 5165.51,1619.25 5203.66,1657.4 D1.1
  Bottom Layer w10: 2.P 4927.79,1805 v1(5113.54,1619.25)
NetC7_1: C7.1 U1.49
NetC8_1: C8.1 U1.73 | length 3.6
  Top Layer w10: U1.73 U1.73@5417.6,2374.92 ; C8.1@5432.5,2490.26 C8.1
NetC13_1: C13.1 U3.1
NetC13_2: C13.2 U3.3
NetC14_1: C14.1 U3.4
NetC14_2: C14.2 U3.5
NetC15_1: C15.1 U3.2
NetC16_1: C16.1 U3.6
NetJ3_1: J3.1 Jm3.2
NetJ3_2: J3.2 Jm2.2
NetJ3_3: J3.3 Jm1.2
NetP_LED1_1: P_LED1.1 R14.2 | length 125.8
  Top Layer w10: R14.2 6594.13,2485 6645.2,2433.94 P_LED1.1
NetP_LED2_1: P_LED2.1 R15.2 | length 108.1
  Top Layer w10: R15.2 P_LED2.1
NetP_LED3_1: P_LED3.1 R16.2 | length 119.9
  Top Layer w10: R16.2 6619.13,2670 6645.2,2696.06 P_LED3.1
NetR3_2: R3.2 SD1.9
NetR12_1: R12.1 Reset1.1 U1.94
nRESET: C6.2 P1.3 U1.14
OSC8MHz_IN: C9.1 U1.12 Y1.1 | length 389.3
  Top Layer w10: U1.12 5594.69,1665.67 Y1.1 5592.76,1583.7 5643.62,1532.83 C9.1
OSC8MHz_OUT: C10.1 U1.13 Y1.3 | length 415.3
  Top Layer w10: U1.13 5614.37,1719.57 5650.62,1683.31 5650.62,1622.92 5687.24,1586.3 Y1.3 5702.13,1491.38 C10.1
OSC32.678kHz_IN: C11.1 U1.8 Y2.1 | length 486.2
  Top Layer w10: C11.1 5255,1455.91 5302.36,1503.27 Y2.1 5388.82,1503.27 5409.41,1523.86 5409.41,1578.62 5450.55,1619.76 5450.55,1685.83 5515.87,1751.15 5515.87,1782.4 U1.8
OSC32.678kHz_OUT: C12.1 U1.9 Y2.4 | length 547.2
  Top Layer w10: U1.9 5535.63,1757.05 5533.87,1755.28 5533.87,1745.11 5470,1681.24 5470,1536.26 5470.89,1535.37 5470.89,1523.86 5491.48,1503.27 Y2.4 5502.99,1407.48 5590.47,1320 C12.1
RS232_RX: J10.2 U3.13
RS232_TX: J10.3 U3.14
RTN: 2.N C1.1 C2.2 C3.1 C4.2 C5.2 C6.1 C7.2 C8.2 C9.2 C10.2 C11.2 C12.2 C15.2 C16.2 C17.2 Cd1.1 Cd2.1 Cd3.1 Cd4.1 Cd5.1 Cd6.1 Cd7.1 Cd8.1 Cd9.1 ESP1.14 ESP1.32 ESP1.38 J1.1 J2.1 J4.1 J5.1 J6.1 J7.1 J8.2 J8.3 J9.1 J10.1 J11.1 J12.1 J13.1 J13.2 P1.5 P2.8 P_LED1.2 P_LED2.2 P_LED3.2 R12.2 SD1.6 SD1.11 SD1.12 U1.10 U1.20 U1.27 U1.74 U1.99 U2.2 U2.4 U3.15 Y1.2 Y1.4
SD_CD: SD1.10 U1.77
SDIO_CLK: R7.2 SD1.5 U1.80
SDIO_CMD: R5.2 SD1.3 U1.83
SDIO_D0: R8.2 SD1.7 U1.65
SDIO_D1: R9.2 SD1.8 U1.66
SDIO_D2: R2.2 SD1.1 U1.78
SDIO_D3: R4.2 SD1.2 U1.79
SELEC_A: J3.6 U1.39 | length 1024.5
  Top Layer w10: U1.39 6011.57,2098.43 6190,1920 6390,1920 6561.85,1748.15 6790,1748.15
SELEC_B: J3.5 U1.40 | length 1019.7
  Top Layer w10: U1.40 6029.77,2118.11 6207.88,1940 6394.04,1940 6521.04,1813 6756.43,1813 6790,1846.57
SELEC_C: J3.4 U1.41 | length 1054.5
  Top Layer w10: U1.41 6034.12,2137.8 6214.92,1957 6423,1957 6550,1830 6675,1830 6790,1945
SELEC_G1: Jm1.1 U1.42 | length 761.2
  Top Layer w10: U1.42 6038.48,2157.48 6215.96,1980 6565,1980 6585,1960 Jm1.1
SELEC_G2A: Jm2.1 U1.43 | length 728.3
  Top Layer w10: U1.43 6042.83,2177.17 6174.72,2045.28 6569.72,2045.28 Jm2.1
SELEC_G2B: Jm3.1 U1.44 | length 696.7
  Top Layer w10: U1.44 6214,2196.85 6277.15,2260 6560,2260 Jm3.1
SHT-30_SCL1: J11.3 U1.92
SHT-30_SDA1: J11.2 U1.93
SMU_RX1s: U1.64 U3.12
SMU_TX1s: U1.63 U3.11
SWCLK: P1.4 U1.76
SWDIO: P1.2 U1.72
SWO: P1.6 U1.89
THERM1: J1.2 R1.2 U1.29 | length 470.4
  Top Layer w10: U1.29 6023.43,1901.57 6060,1865 6060,1684.66 6146.64,1598.02 R1.2
THERM2: J2.2 R6.2 U1.30 | length 966.7
  Top Layer w10: U1.30 6033.74,1921.26 6110,1845 6110,1825 6436.87,1498.13 6488.19,1498.13 6606.64,1379.67 R6.2
THERM3: J4.2 R10.2 U1.31 | length 1039.6
  Top Layer w10: U1.31 6038.1,1940.94 6135,1844.04 6135,1824.04 6443.91,1515.13 6591.51,1515.13 6595.82,1510.82 6759.18,1510.82 J4.2
THERM4: J6.2 R11.2 U1.32 | length 499
  Top Layer w10: U1.32 6092.99,1960.63 6181.98,1871.64 6185,1871.64 6188.32,1868.32 6220,1868.32 6366.68,1868.32 6370,1865
THERM5: J7.2 R13.2 U1.35
Vbat: C1.2 D1.3 U1.6 | length 277.8
  Top Layer w10: D1.3 5330.04,1620 5403.03,1692.99 C1.2 5406.97,1692.99 5441.56,1727.59 5452.93,1727.59 5476.5,1751.15 5476.5,1782.4 U1.6
pads on no net: ESP1. ESP1.1 ESP1.2 ESP1.3 ESP1.4 ESP1.5 ESP1.6 ESP1.7 ESP1.8 ESP1.9 ESP1.10 ESP1.11 ESP1.12 ESP1.13 ESP1.15 ESP1.16 ESP1.17 ESP1.18 ESP1.20 ESP1.21 ESP1.22 ESP1.23 ESP1.24 ESP1.25 ESP1.26 ESP1.27 ESP1.28 ESP1.29 ESP1.30 ESP1.31 ESP1.33 ESP1.36 ESP1.37 H1.0 H2.0 H3.0 J3. J10.4 SD1.13 SD1.14 U1.7 U1.15 U1.16 U1.17 U1.18 U1.25 U1.33 U1.34 U1.36 U1.37 U1.38 U1.45 U1.46 U1.51 U1.52 U1.53 U1.54 U1.55 U1.59 U1.60 U1.61 U1.62 U1.67 U1.68 U1.69 U1.70 U1.71 U1.81 U1.82 U1.84 U1.85 U1.88 U1.90 U1.91 U1.95 U1.96 U1.97 U1.98 U3.7 U3.8 U3.9 U3.10 Y2.2 Y2.3

## Text inside footprints (layer, text, board x,y; h text height)
P1: Top Overlay "6" at 5066.93,1849.96 h40 r270; Top Overlay "1" at 5066.93,2339.72 h40 r270
P2: Top Overlay "1" at 4790.28,1141.93 h40; Top Overlay "8" at 5480.04,1141.93 h40